# EAGLE board DAU_Kupplung_3phasig_ATmega (EAGLE 6.1)
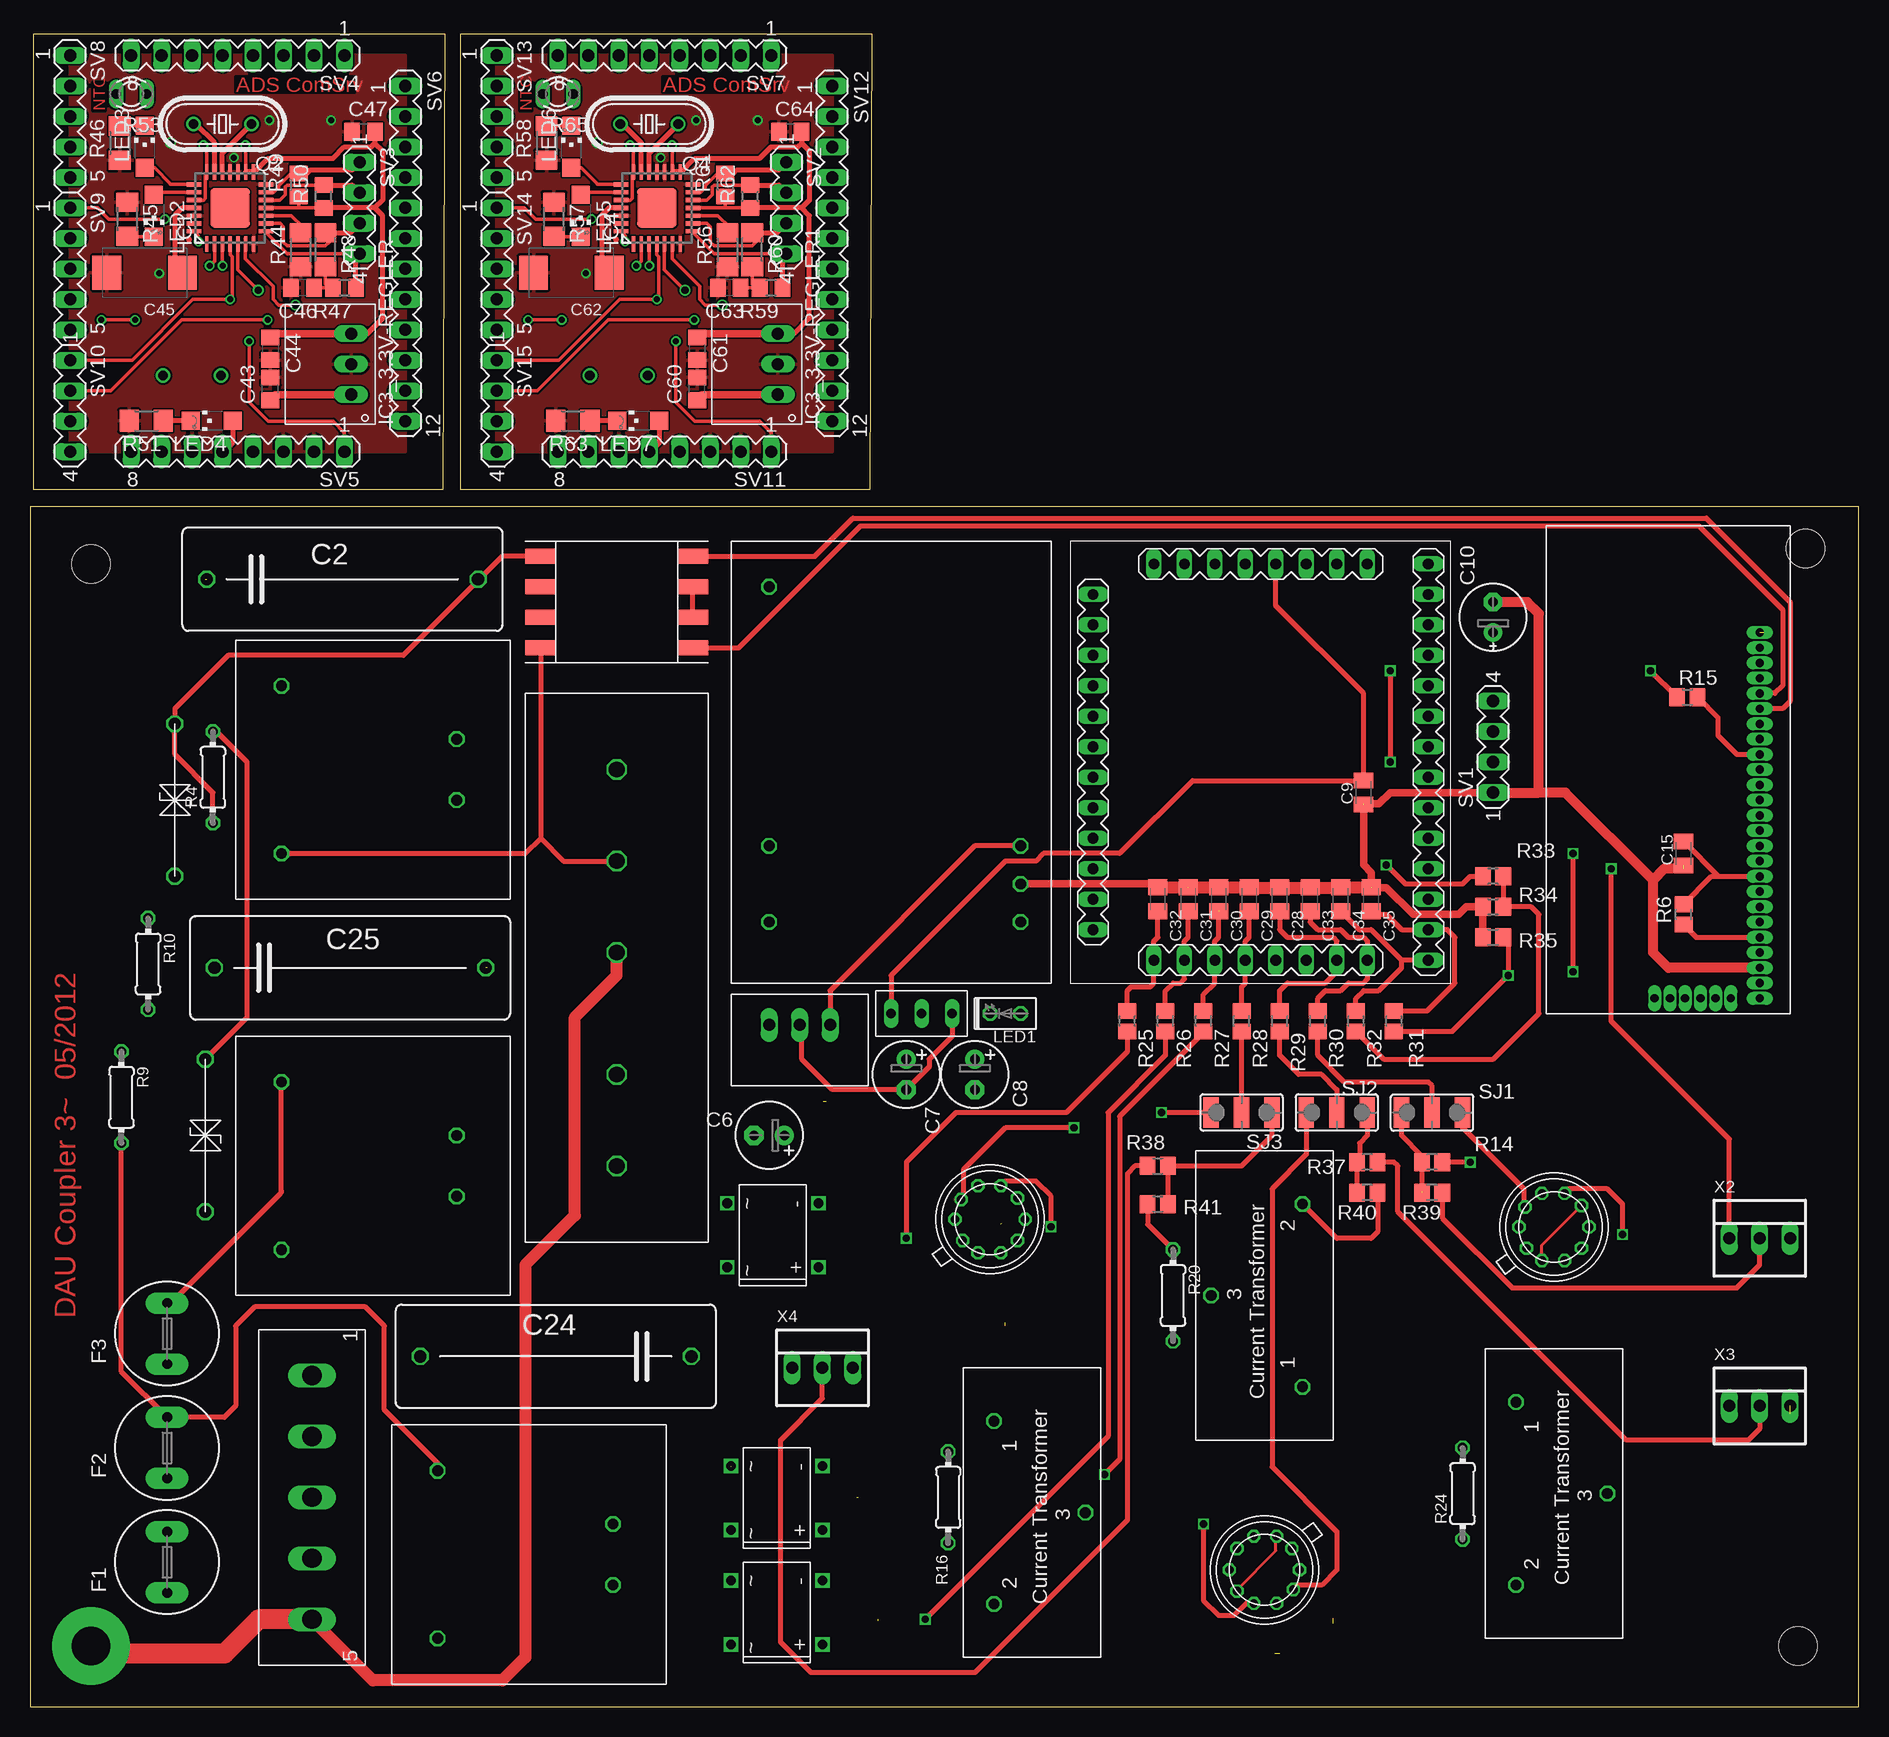
[diagram p0: board, top side]
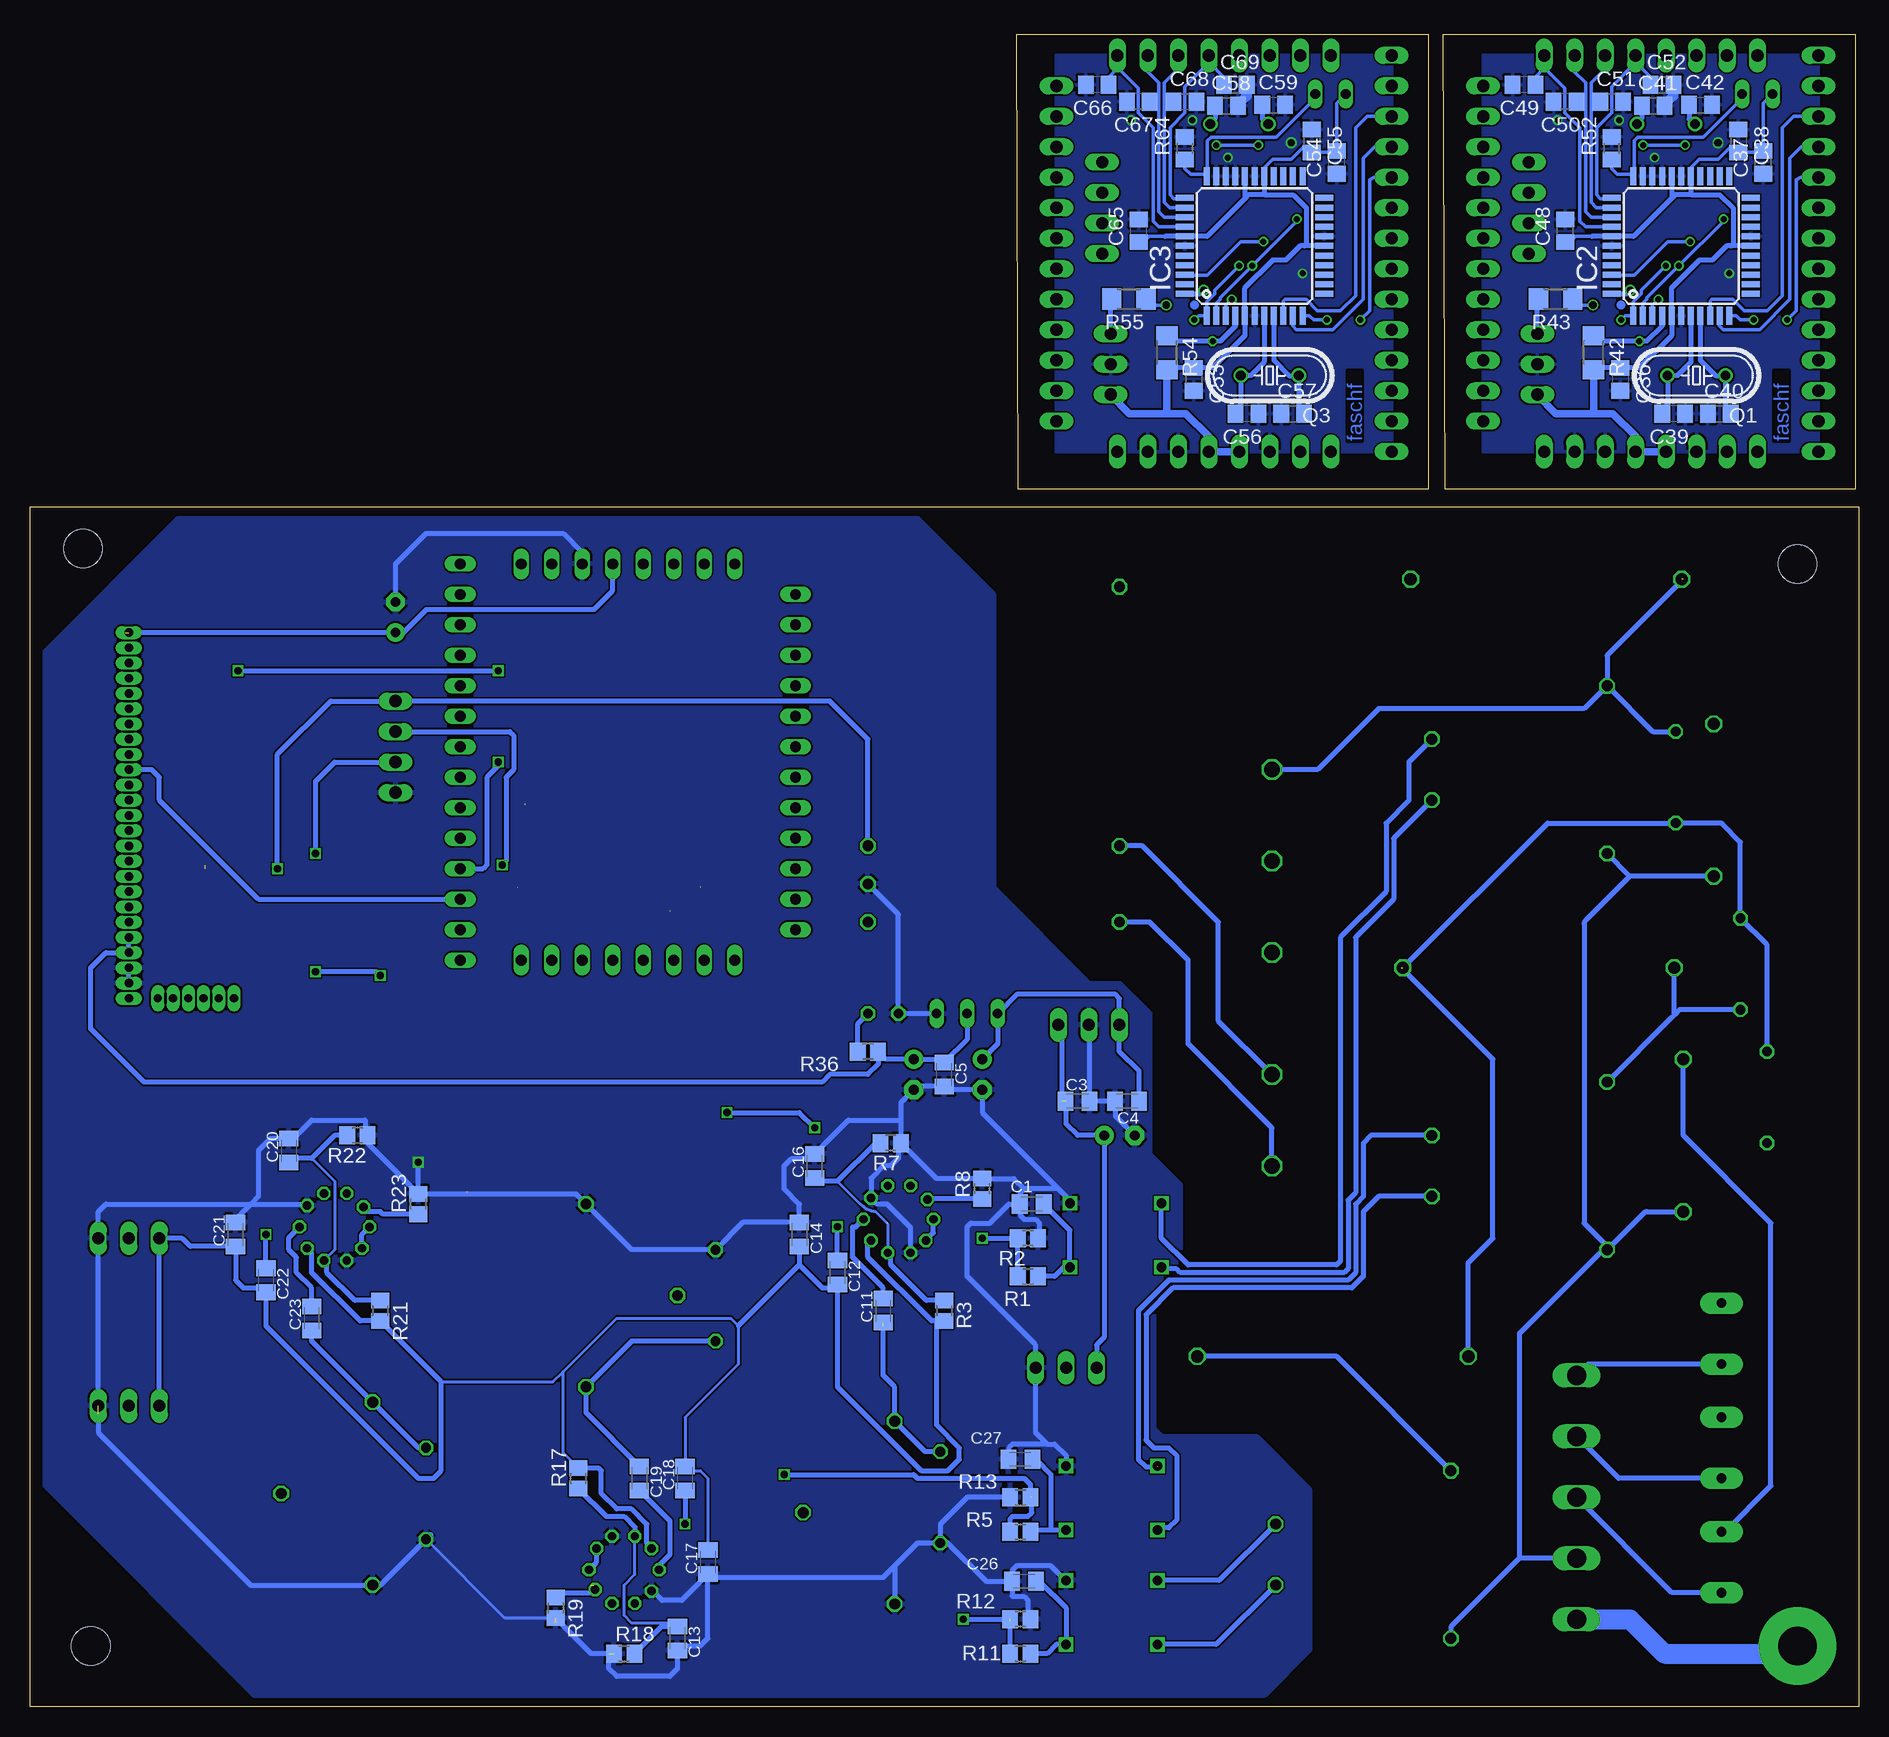
[diagram p1: board, bottom side, seen from below]

Size 152.38 x 139.38 mm. Coordinates in mm from the lower left corner, seen from the top.
Outline: 0,0 152.38,0 152.38,100 0,100 0,0
Outline: 34.61,139.38 0.28,139.38 0.28,101.46 34.45,101.46 34.61,139.38
Outline: 70.17,139.38 35.84,139.38 35.84,101.46 70.01,101.46 70.17,139.38
Copper layers (1*16): Top 0.035mm / dielectric 1.5mm / Bottom 0.035mm
Design rules: minimum track width 0.15mm, minimum drill 0.3mm, track to track 0.15mm, track to pad 0.15mm, pad to pad 0.15mm, via to via 0.15mm, smd to smd 0.15mm, copper to edge 0.3mm, drill to drill 0.2mm, minimum pad ring 0.2mm, minimum via ring 0.15mm, stop-mask expansion 0.075mm, vias tented up to drill 0mil, thermal gap 0.2mm
Holes 3.2 mm at 147.96,96.52 147.32,5.08 5.08,95.25

## Footprints (pad centres in the part's own frame; a part is rotated, then mirrored left to right if it is on the bottom)
AC1010 = drill 0.9 octagon: P$1 20.32,8.89; P$2 5.08,8.89; P$3 12.7,1.27
C0805K = smd 1.3 x 1.6: 1 -1,0; 2 1,0
C225-087X268 = drill 1.016 octagon: 1 -11.303,0; 2 11.303,0
E2,5-6 = drill 0.813 pad 1.6: + -1.27,0 | drill 0.813 pad 1.6 octagon: - 1.27,0
E2,5-6E = drill 0.813 pad 1.575: + -1.27,0 | drill 0.813 pad 1.575 octagon: - 1.27,0
C0805 = smd 1.3 x 1.5: 1 -0.95,0; 2 0.95,0
SMC_D = smd 2.4 x 2.8: + -3.15,0; - 3.15,0
TR5 = drill 0.813 pad 1.778 long: 1 -2.54,0; 2 2.54,0
QFN28_LONG_ERRLES = smd 1.27 x 0.35: 1 -3,1.95; 2 -3,1.3; 3 -3,0.65; 4 -3,0; 5 -3,-0.65; 6 -3,-1.3; 7 -3,-1.95; 15 3,-1.95; 16 3,-1.3; 17 3,-0.65; 18 3,0; 19 3,0.65; 20 3,1.3; 21 3,1.95 | smd 0.35 x 1.27: 8 -1.95,-3; 9 -1.3,-3; 10 -0.65,-3; 11 0,-3; 12 0.65,-3; 13 1.3,-3; 14 1.95,-3; 22 1.95,3; 23 1.3,3; 24 0.65,3; 25 0,3; 26 -0.65,3; 27 -1.3,3; 28 -1.95,3 | smd 3.302 x 3.302: EXP 0,0
TQFP44 = smd 1.5 x 0.5: 1 -5.8,4; 2 -5.8,3.2; 3 -5.8,2.4; 4 -5.8,1.6; 5 -5.8,0.8; 6 -5.8,0; 7 -5.8,-0.8; 8 -5.8,-1.6; 9 -5.8,-2.4; 10 -5.8,-3.2; 11 -5.8,-4; 23 5.8,-4; 24 5.8,-3.2; 25 5.8,-2.4; 26 5.8,-1.6; 27 5.8,-0.8; 28 5.8,0; 29 5.8,0.8; 30 5.8,1.6; 31 5.8,2.4; 32 5.8,3.2; 33 5.8,4 | smd 0.5 x 1.5: 12 -4,-5.8; 13 -3.2,-5.8; 14 -2.4,-5.8; 15 -1.6,-5.8; 16 -0.8,-5.8; 17 0,-5.8; 18 0.8,-5.8; 19 1.6,-5.8; 20 2.4,-5.8; 21 3.2,-5.8; 22 4,-5.8; 34 4,5.8; 35 3.2,5.8; 36 2.4,5.8; 37 1.6,5.8; 38 0.8,5.8; 39 0,5.8; 40 -0.8,5.8; 41 -1.6,5.8; 42 -2.4,5.8; 43 -3.2,5.8; 44 -4,5.8
RECOM_3POL = drill 1.016 long: 1 -2.54,0; 2 0,0; 3 2.54,0
LED2X5 = drill 0.813 octagon: A -1.27,0; K 1.27,0
CHIPLED_1206 = smd 1.5 x 1.5: A 0,-1.75; C 0,1.75
TSV = drill 1 octagon: P$1 -5.08,0; P$2 7.62,0
HC49/S = drill 0.813: 1 -2.413,0; 2 2.413,0
R0805 = smd 1.3 x 1.5: 1 -0.85,0; 2 0.85,0
0204/7 = drill 0.813 octagon: 1 -3.81,0; 2 3.81,0
R1206 = smd 1.6 x 1.803: 1 -1.422,0; 2 1.422,0
R0805' = smd 1.3 x 1.5: 1 -0.95,0; 2 0.95,0
P640 = drill 0.813 long: 1 -1.27,0; 2 1.27,0
SJ_2W = smd 1.27 x 2.54: 1 -2.54,0; 2 0,0; 3 2.54,0
MA04-1 = drill 1.016 long: 1 -3.81,0; 2 -1.27,0; 3 1.27,0; 4 3.81,0
MA08-1 = drill 1.016 long: 1 -8.89,0; 2 -6.35,0; 3 -3.81,0; 4 -1.27,0; 5 1.27,0; 6 3.81,0; 7 6.35,0; 8 8.89,0
MA12-1 = drill 1.016 long: 1 -13.97,0; 2 -11.43,0; 3 -8.89,0; 4 -6.35,0; 5 -3.81,0; 6 -1.27,0; 7 1.27,0; 8 3.81,0; 9 6.35,0; 10 8.89,0; 11 11.43,0; 12 13.97,0
MA05-1 = drill 1.016 long: 1 -5.08,0; 2 -2.54,0; 3 0,0; 4 2.54,0; 5 5.08,0
RAC04_12SA = drill 0.9 octagon: +VO 25.4,24.13; GND 28.575,24.13; L 31.75,3.175; N 25.4,3.175; NC 3.81,3.175; NC1 31.75,24.13
TRAFO_0,35VA = drill 0.9 octagon: L 3.81,17.78; N 3.81,3.81; OUT1 18.415,13.335; OUT2 18.415,8.255
ADUC_MINIMUM = drill 0.9 long: ADC0 -9.207,-16.51; ADC1 -6.668,-16.51; ADC2 -4.128,-16.51; ADC3 -1.587,-16.51; ADC4 6.032,-16.51; ADC5 8.572,-16.51; ADC6 13.652,-16.51; ADC7 13.652,-13.97; ALE -14.287,6.35; DAC0 0.953,-16.51; DAC1 3.493,-16.51; GND 3.493,16.51; GND2 -4.128,16.51; GND3 -6.668,16.51; INT0 13.652,-6.35; MISO 13.652,-3.81; MOSI 13.652,11.43; P00 -14.287,3.81; P01 -14.287,1.27; P02 -14.287,-1.27; P03 -14.287,-3.81; P04 -14.287,-6.35; P05 -14.287,-8.89; P06 -14.287,-11.43; P07 -14.287,-13.97; P20 13.652,13.97; P21 13.652,16.51; P22 8.572,16.51; P23 6.032,16.51; P24 -9.207,16.51; P25 -14.287,13.97; P34 13.652,-1.27; P35 13.652,1.27; P36 13.652,3.81; P37 13.652,6.35; PWM0 -14.287,11.43; PWM1 -14.287,8.89; RXD 13.652,-11.43; SCLOCK 13.652,8.89; TXD 13.652,-8.89; VCC 0.953,16.51; VCC1 -1.587,16.51
MODEM_FUSS = drill 0.7 pad 0.813 long: P$1 -20.32,-8.89; P$2 -19.05,-8.89; P$3 -17.78,-8.89; P$4 -16.51,-8.89; P$5 -15.24,-8.89; P$6 -13.97,-8.89; P$7 -12.7,-8.89; P$8 -11.43,-8.89; P$9 -10.16,-8.89; P$10 -8.89,-8.89; P$11 -7.62,-8.89; P$12 -6.35,-8.89; P$13 -5.08,-8.89; P$14 -3.81,-8.89; P$15 -2.54,-8.89; P$16 -1.27,-8.89; P$17 0,-8.89; P$18 1.27,-8.89; P$19 2.54,-8.89; P$20 3.81,-8.89; P$21 5.08,-8.89; P$22 6.35,-8.89; P$23 7.62,-8.89; P$24 8.89,-8.89; P$25 10.16,-8.89; P$29 -20.32,-3.937; P$30 -20.32,-5.207; P$31 -20.32,-6.477 | drill 0.7 pad 0.61 long: P$26 -20.32,-0.127; P$27 -20.32,-1.397; P$28 -20.32,-2.667
PLC-UEBERTRAGER_V2 = smd 2.54 x 1.27: 1LINE1 6.35,3.81; 2 6.35,1.27; 3 6.35,-1.27; 4LINE2 6.35,-3.81; 6NC -6.35,1.27; 7NC -6.35,-1.27; 8N -6.35,-3.81; L5 -6.35,3.81
RECTIFIER = drill 0.8 square: + 6.858,7.62; - 1.524,7.62; ~1 1.524,0; ~2 6.858,0
RECOM785X = drill 1 long: GND 0,2.54; VIN -2.54,2.54; VOUT 2.54,2.54
TS1084_HOCH = drill 0.8 long: GND 0,0; IN 5.08,0; OUT 2.54,0
TO100_10PIN = drill 0.7 octagon: 1 2.794,-1.016; 2 2.794,0.889; 3 1.778,2.286; 4 0,2.921; 5 -1.778,2.286; 6 -2.794,0.889; 7 -2.794,-1.016; 8 -1.651,-2.413; 9 0,-2.921; 10 1.778,-2.286
NETZFILTER = drill 1.3 octagon: L 6.35,7.62; L' 39.37,7.62; N 13.97,7.62; N' 31.75,7.62; PE 21.59,7.62
CONNECTOR_5_POL = drill 1.6 long: P$1 3.81,4.445; P$2 8.89,4.445; P$3 13.97,4.445; P$4 19.05,4.445; P$5 24.13,4.445
22-23-2031 = drill 1 long: 1 -2.54,0; 2 0,0; 3 2.54,0

## Placement (x,y rotation side)
AC1002_1  AC1010  [AC1010]  89.22,3.49 90 top
C1  1µ  [C0805K]  68.9,41.91 180 bottom
C2  470n/270V  [C225-087X268]  26.04,93.98 0 top
C3  100n  [C0805K]  65.09,50.48 0 bottom
C4  100n  [C0805K]  60.96,50.48 180 bottom
C5  100n  [C0805K]  76.2,52.7 270 bottom
C6  4,7µ  [E2,5-6]  61.59,47.62 180 top
C7  4,7µ  [E2,5-6]  73.03,52.7 270 top
C8  4,7µ  [E2,5-6]  78.74,52.7 270 top
C9  100n  [C0805K]  111.12,76.2 90 top
C10  4µ7  [E2,5-6E]  121.92,90.81 90 top
C11  1µ  [C0805K]  81.28,33.02 90 bottom
C12  4µ7  [C0805K]  85.09,36.2 270 bottom
C13  1µ  [C0805K]  98.42,5.71 270 bottom
C14  1µ  [C0805K]  88.27,39.37 270 bottom
C15  1µ  [C0805K]  137.79,71.12 90 top
C16  1µ  [C0805K]  87,45.09 90 bottom
C17  1µ  [C0805K]  95.89,12.06 90 bottom
C18  4µ7  [C0805K]  97.79,19.05 90 bottom
C19  1µ  [C0805K]  101.6,19.05 270 bottom
C20  1µ  [C0805K]  130.81,46.35 90 bottom
C21  1µ  [C0805K]  135.25,39.37 90 bottom
C22  4µ7  [C0805K]  132.72,35.56 270 bottom
C23  1µ  [C0805K]  128.91,32.38 90 bottom
C24  470n/270V  [C225-087X268]  43.81,29.21 180 top
C25  470n/270V  [C225-087X268]  26.67,61.59 0 top
C26  1µ  [C0805K]  69.53,10.48 180 bottom
C27  1µ  [C0805K]  69.85,20.64 180 bottom
C28  100n  [C0805K]  104.14,67.31 90 top
C29  100n  [C0805K]  101.6,67.31 90 top
C30  100n  [C0805K]  99.06,67.31 90 top
C31  100n  [C0805K]  96.52,67.31 90 top
C32  100n  [C0805K]  93.98,67.31 90 top
C33  100n  [C0805K]  106.68,67.31 90 top
C34  100n  [C0805K]  109.22,67.31 90 top
C35  100n  [C0805K]  111.76,67.31 90 top
C36  100n  [C0805]  19.85,110.63 270 bottom
C37  100n  [C0805]  7.93,128.72 90 bottom
C38  100n  [C0805]  10.01,130.49 270 bottom
C39  22p  [C0805]  15.41,107.78 180 bottom
C40  22p  [C0805]  11.6,107.78 0 bottom
C41  22p  [C0805]  17.11,133.44 0 bottom
C42  22p  [C0805]  13.18,133.5 0 bottom
C43  100n  [C0805]  20.03,109.84 90 top
C44  100n  [C0805]  20.03,113.18 270 top
C45  10u  [SMC_D]  9.55,119.52 180 top
C46  10n  [C0805]  22.71,118.25 180 top
C47  10n  [C0805]  27.79,131.27 0 top
C48  100n  [C0805]  24.43,123.02 90 bottom
C49  10n  [C0805]  27.89,135.18 180 bottom
C50  10n  [C0805]  24.46,133.78 180 bottom
C51  10n  [C0805]  20.57,133.78 0 bottom
C52  10n  [C0805]  16.37,135.18 0 bottom
C53  100n  [C0805]  55.41,110.63 270 bottom
C54  100n  [C0805]  43.49,128.72 90 bottom
C55  100n  [C0805]  45.57,130.49 270 bottom
C56  22p  [C0805]  50.97,107.78 180 bottom
C57  22p  [C0805]  47.16,107.78 0 bottom
C58  22p  [C0805]  52.67,133.44 0 bottom
C59  22p  [C0805]  48.74,133.5 0 bottom
C60  100n  [C0805]  55.59,109.84 90 top
C61  100n  [C0805]  55.59,113.18 270 top
C62  10u  [SMC_D]  45.11,119.52 180 top
C63  10n  [C0805]  58.27,118.25 180 top
C64  10n  [C0805]  63.35,131.27 0 top
C65  100n  [C0805]  59.99,123.02 90 bottom
C66  10n  [C0805]  63.45,135.18 180 bottom
C67  10n  [C0805]  60.02,133.78 180 bottom
C68  10n  [C0805]  56.13,133.78 0 bottom
C69  10n  [C0805]  51.93,135.18 0 bottom
F1  T250mA/240V  [TR5]  11.43,12.06 90 top
F2  T250mA/240V  [TR5]  11.43,21.59 90 top
F3  T250mA/240V  [TR5]  11.43,31.11 90 top
IC1  ENC28J60QFN28_LONG_28  [QFN28_LONG_ERRLES]  16.68,124.92 90 top
IC2  MEGA32-A  [TQFP44]  14.77,121.75 90 bottom
IC3  MEGA32-A  [TQFP44]  50.33,121.75 90 bottom
IC3_3.3V-REGLER  78RECOM  [RECOM_3POL]  26.76,111.9 90 top
IC3_3.3V-REGLER1  78RECOM  [RECOM_3POL]  62.32,111.9 90 top
IC4  ENC28J60QFN28_LONG_28  [QFN28_LONG_ERRLES]  52.24,124.92 90 top
LED1  [LED2X5]  81.28,57.78 180 top
LED2  [CHIPLED_1206]  10.33,124.29 180 top
LED3  [CHIPLED_1206]  9.55,130 0 top
LED4  [CHIPLED_1206]  15.13,107.18 90 top
LED5  [CHIPLED_1206]  45.89,124.29 180 top
LED6  [CHIPLED_1206]  45.11,130 0 top
LED7  [CHIPLED_1206]  50.69,107.18 90 top
P6KE300CA  P6KE300CA  [TSV]  14.61,48.9 270 top
Q1  16MHz  [HC49/S]  13.5,110.95 180 bottom
Q2  25MHz  [HC49/S]  16.04,131.91 180 top
Q3  16MHz  [HC49/S]  49.06,110.95 180 bottom
Q4  25MHz  [HC49/S]  51.6,131.91 180 top
R1  82k  [R0805]  69.22,35.88 0 bottom
R2  33k  [R0805]  69.22,39.05 180 bottom
R3  22k  [R0805]  76.2,33.02 270 bottom
R4  470k  [0204/7]  15.24,77.47 90 top
R5  82k  [R0805]  69.85,14.61 0 bottom
R6  1M  [R0805]  137.79,66.04 90 top
R7  10k  [R0805]  80.64,46.99 180 bottom
R8  4k7  [R0805]  73.03,43.18 90 bottom
R9  470k  [0204/7]  7.62,50.8 270 top
R10  470k  [0204/7]  9.84,61.91 270 top
R11  82k  [R0805]  69.85,4.45 0 bottom
R12  33k  [R0805]  69.85,7.3 180 bottom
R13  33k  [R0805]  69.85,17.46 0 bottom
R14  220R/33k  [R0805]  116.84,45.4 180 top
R15  330R  [R0805]  138.11,84.14 0 top
R16  68R  [0204/7]  76.52,17.46 90 top
R17  22k  [R0805]  106.68,19.05 90 bottom
R18  10k  [R0805]  102.87,4.45 0 bottom
R19  4k7  [R0805]  108.58,8.26 270 bottom
R20  68R  [0204/7]  95.25,34.29 270 top
R21  22k  [R0805]  123.19,33.02 270 bottom
R22  10k  [R0805]  125.09,47.62 180 bottom
R23  4k7  [R0805]  120.02,41.91 90 bottom
R24  68R  [0204/7]  119.38,17.78 90 top
R25  10R  [R0805]  91.44,57.15 90 top
R26  10R  [R0805]  94.61,57.15 90 top
R27  10R  [R0805]  97.79,57.15 90 top
R28  10R  [R0805]  100.97,57.15 90 top
R29  10R  [R0805]  104.14,57.15 90 top
R30  10R  [R0805]  107.31,57.15 90 top
R31  10R  [R0805]  113.67,57.15 90 top
R32  10R  [R0805]  110.49,57.15 90 top
R33  680k  [R0805]  121.92,69.22 180 top
R34  470k  [R0805]  121.92,66.67 0 top
R35  220R  [R0805]  121.92,64.14 0 top
R36  330R  [R0805]  82.55,54.61 180 bottom
R37  0/82k  [R0805]  111.44,45.4 180 top
R38  0/82k  [R0805]  93.98,45.09 0 top
R39  0/82k  [R0805]  116.84,42.86 180 top
R40  220R/33k  [R0805]  111.44,42.86 180 top
R41  220R/33k  [R0805]  93.98,41.91 0 top
R42  10k  [R1206]  22.08,112.86 270 bottom
R43  10k  [R1206]  25.24,117.33 180 bottom
R44  2k2  [R1206]  22.56,121.43 90 top
R45  220R  [R1206]  8.11,123.97 270 top
R46  220R  [R1206]  7.48,130.32 90 top
R47  51R  [R0805']  26.2,118.25 180 top
R48  51R  [R1206]  24.62,121.43 270 top
R49  51R  [R0805']  22.39,126.83 90 top
R50  51R  [R0805']  24.47,125.87 90 top
R51  220R  [R1206]  9.68,107.18 180 top
R52  10k  [R0805']  20.57,129.89 90 bottom
R53  [P640]  8.44,134.4 180 top
R54  10k  [R1206]  57.64,112.86 270 bottom
R55  10k  [R1206]  60.8,117.33 180 bottom
R56  2k2  [R1206]  58.12,121.43 90 top
R57  220R  [R1206]  43.67,123.97 270 top
R58  220R  [R1206]  43.04,130.32 90 top
R59  51R  [R0805']  61.76,118.25 180 top
R60  51R  [R1206]  60.18,121.43 270 top
R61  51R  [R0805']  57.95,126.83 90 top
R62  51R  [R0805']  60.03,125.87 90 top
R63  220R  [R1206]  45.24,107.18 180 top
R64  10k  [R0805']  56.13,129.89 90 bottom
R65  [P640]  44,134.4 180 top
SJ1  [SJ_2W]  116.84,49.53 0 top
SJ2  [SJ_2W]  108.9,49.53 180 top
SJ3  [SJ_2W]  100.97,49.53 180 top
SV1  [MA04-1]  121.92,80.01 90 top
SV2  [MA04-1]  63.03,124.92 270 top
SV3  [MA04-1]  27.47,124.92 270 top
SV4  [MA08-1]  17.31,137.62 180 top
SV5  [MA08-1]  17.31,104.6 180 top
SV6  [MA12-1]  31.28,121.11 270 top
SV7  [MA08-1]  52.87,137.62 180 top
SV8  [MA05-1]  3.34,132.54 270 top
SV9  [MA05-1]  3.34,119.84 270 top
SV10  [MA04-1]  3.34,108.41 270 top
SV11  [MA08-1]  52.87,104.6 180 top
SV12  [MA12-1]  66.84,121.11 270 top
SV13  [MA05-1]  38.9,132.54 270 top
SV14  [MA05-1]  38.9,119.84 270 top
SV15  [MA04-1]  38.9,108.41 270 top
TSV2  TSV  [TSV]  12.06,76.83 270 top
U$1  RECOM_RAC04_12SA  [RAC04_12SA]  58.42,97.16 270 top
U$2  SICHERHEITSTRAFO  [TRAFO_0,35VA]  17.14,67.31 0 top
U$3  ADUC831_MINIMUM  [ADUC_MINIMUM]  102.87,78.74 0 top
U$4  MODEMSTECKER  [MODEM_FUSS]  135.25,79.38 90 top
U$5  PLC_UEBERTRAGER_V2  [PLC-UEBERTRAGER_V2]  48.9,92.08 0 top
U$7  AC1010  [AC1010]  97.16,46.99 270 top
U$8  RECTIFIER  [RECTIFIER]  58.1,43.5 270 top
U$10  RECOM_785_05  [RECOM785X]  64.14,59.37 180 top
U$11  TS1084_HOCH  [TS1084_HOCH]  76.83,57.78 180 top
U$12  AD536  [TO100_10PIN]  102.87,11.43 90 top
U$13  AD536  [TO100_10PIN]  80.01,40.64 270 top
U$14  AC1010  [AC1010]  132.72,5.08 90 top
U$15  AD536  [TO100_10PIN]  127,40.01 270 top
U$16  SICHERHEITSTRAFO  [TRAFO_0,35VA]  30.16,1.91 0 top
U$17  RECTIFIER  [RECTIFIER]  58.42,12.06 270 top
U$18  SICHERHEITSTRAFO  [TRAFO_0,35VA]  17.14,34.29 0 top
U$19  RECTIFIER  [RECTIFIER]  58.42,21.59 270 top
U$20  NETZFILTER_05_A  [NETZFILTER]  41.27,84.45 270 top
X1  CONNECTO_5_POL  [CONNECTOR_5_POL]  19.05,31.43 270 top
X2  22-23-2031  [22-23-2031]  144.15,39.05 0 top
X3  22-23-2031  [22-23-2031]  144.15,25.08 0 top
X4  22-23-2031  [22-23-2031]  66.04,28.26 0 top

## Library data of the parts
AC1002_1 P6KE300CA TSV2 U$1 U$2 U$4 U$7 U$8 U$10-U$20 X1 = ADS
C1-C9 C11-C35 R1-R41 = resistor
C10 C36-C69 R42-R52 R54-R64 = rcl
F1-F3 = fuse; OC_FARNELL: unknown; OC_NEWARK: unknown
IC1 IC4 = microchip
IC2 IC3 = atmel
IC3_3.3V-REGLER IC3_3.3V-REGLER1 = linear
LED1-LED7 = led
Q1-Q4 = crystal
R53 R65 = ptc-ntc
SJ1-SJ3 = jumper
SV1 = con-lstb; OC_FARNELL: unknown; OC_NEWARK: unknown
SV2-SV15 = con-lstb
U$3 = ADS_ADUCBoards
U$5 = ADS1
X2-X4 = con-molex; MF: MOLEX; MPN: 22-23-2031; OC_FARNELL: 1462950; OC_NEWARK: 30C0862

## Nets
1_TD+: IC1.13 R49.2 SV3.1
1_TD+1: IC4.13 R61.2 SV2.1
2_TD-: IC1.12 R50.2 SV3.2
2_TD-1: IC4.12 R62.2 SV2.2
3_RD+: IC1.9 R48.1 SV3.3
3_RD+1: IC4.9 R60.1 SV2.3
6_RD-: IC1.8 R47.1 SV3.4
6_RD-1: IC4.8 R59.1 SV2.4
+3V3: C5.1 C8.+ R6.1 R36.1 U$4.P$4 U$4.P$5 U$11.OUT
+5V: C4.1 C7.+ C9.2 C10.+ U$3.VCC U$4.P$25 U$10.VOUT U$11.IN
+12V: C3.1 C6.+ C12.2 C14.2 C17.2 C18.2 C21.1 C22.2 R3.2 R17.2 R21.2 SV1.4 U$1.+VO U$10.VIN U$12.3 U$13.3 U$15.3 X2.1 X3.1 X4.1
ADC0: C32.1 R25.2 U$3.ADC0
ADC1: C31.1 R26.2 U$3.ADC1
ADC2: C30.1 R27.2 U$3.ADC2
ADC3: C29.1 R28.2 U$3.ADC3
ADC4: C28.1 R29.2 U$3.ADC4
ADC5: C33.1 R30.2 U$3.ADC5
ADC6: C49.1 IC2.37 SV4.1
ADC7: C50.1 IC2.36 SV4.2
ADC8: C51.1 IC2.35 SV4.3
ADC9: C52.1 IC2.34 SV4.4
ADC10: C66.1 IC3.37 SV7.1
ADC11: C67.1 IC3.36 SV7.2
ADC12: C68.1 IC3.35 SV7.3
ADC13: C69.1 IC3.34 SV7.4
GND: AC1002_1.P$2 C1.2 C3.2 C4.2 C5.2 C6.- C7.- C8.- C9.1 C10.- C13.2 C14.1 C15.1 C16.2 C17.1 C20.2 C21.2 C26.2 C27.2 C28.2 C29.2 C30.2 C31.2 C32.2 C33.2 C34.2 C35.2 LED1.K R2.1 R7.1 R8.2 R12.1 R13.1 R14.1 R16.1 R18.1 R19.2 R20.1 R22.1 R23.2 R24.1 R34.1 R35.1 R40.1 R41.1 SV1.1 U$1.GND U$3.GND U$4.P$2 U$4.P$3 U$7.P$2 U$8.- U$10.GND U$11.GND U$12.1 U$12.5 U$13.1 U$13.5 U$14.P$2 U$15.1 U$15.5 U$17.- U$19.- X2.3 X3.3 X4.3
GND1: C36.2 C37.1 C38.1 C39.1 C40.1 C41.2 C42.2 C43.2 C44.2 C45.- C46.2 C47.1 C48.2 C49.2 C50.2 C51.2 C52.2 IC1.7 IC1.14 IC1.17 IC1.18 IC1.26 IC2.6 IC2.18 IC2.28 IC2.30 IC2.31 IC2.32 IC2.39 IC3_3.3V-REGLER.2 R44.1 R45.1 R46.1 R51.2 R52.2 SV5.2 SV5.3 SV5.6
GND2: C53.2 C54.1 C55.1 C56.1 C57.1 C58.2 C59.2 C60.2 C61.2 C62.- C63.2 C64.1 C65.2 C66.2 C67.2 C68.2 C69.2 IC3.6 IC3.18 IC3.28 IC3.30 IC3.31 IC3.32 IC3.39 IC3_3.3V-REGLER1.2 IC4.7 IC4.14 IC4.17 IC4.18 IC4.26 R56.1 R57.1 R58.1 R63.2 R64.2 SV11.2 SV11.3 SV11.6
I1: R28.1 SJ3.2
I1INTERN: R8.1 SJ3.3 U$13.8
I2: R29.1 SJ2.2
I2INTERN: R19.1 SJ2.3 U$12.8
I3: R30.1 SJ1.2
I3INTERN: R23.1 SJ1.3 U$15.8
INT0: IC2.11 SV8.5
INT1: IC3.11 SV13.5
L1: C2.1 F1.2 P6KE300CA.P$1 R4.2 U$2.L U$20.L
L2: C24.1 F2.2 R9.2 U$16.L
L3: C25.1 F3.2 R10.2 U$18.L
MISO: IC1.2 IC2.2 SV9.1
MISO1: IC3.2 IC4.2 SV14.1
MOSI: IC1.3 IC2.1 SV10.2
MOSI1: IC3.1 IC4.3 SV15.2
N: P6KE300CA.P$2 TSV2.P$2 U$2.N U$5.8N U$16.N U$18.N U$20.N X1.P$4
N$1: R15.2 U$4.P$17
N$2: AC1002_1.P$1 C11.1 R16.2
N$3: C11.2 U$13.4
N$4: U$2.OUT1 U$8.~1
N$5: U$4.P$20 U$5.1LINE1
N$6: U$13.9 U$13.10
N$7: C1.1 R1.2 U$8.+
N$8: C35.1 R31.2 U$3.ADC7
N$9: U$2.OUT2 U$8.~2
N$10: C26.1 R11.2 U$17.+
N$11: U$16.OUT1 U$17.~1
N$12: U$16.OUT2 U$17.~2
N$13: U$4.P$21 U$5.4LINE2
N$14: R15.1 U$3.TXD
N$15: U$3.RXD U$4.P$16
N$16: U$1.L U$20.L'
N$17: C16.1 R3.1 R7.2 U$13.2
N$18: C40.2 IC2.8 Q1.1
N$19: LED1.A R36.2
N$20: C15.2 R6.2 U$4.P$9
N$21: C12.1 U$13.6
N$22: C19.1 R20.2 U$7.P$1
N$23: C19.2 U$12.4
N$24: U$12.9 U$12.10
N$25: C34.1 R32.2 U$3.ADC6
N$26: C2.2 C24.2 C25.2 R4.1 R9.1 R10.1 TSV2.P$1 U$5.L5
N$27: C13.1 R17.1 R18.2 U$12.2
N$28: C39.2 IC2.7 Q1.2
N$29: C18.1 U$12.6
N$30: C23.1 R24.2 U$14.P$1
N$31: C23.2 U$15.4
N$32: U$15.9 U$15.10
N$33: U$5.2 U$5.3
N$34: C27.1 R5.2 U$19.+
N$35: U$18.OUT1 U$19.~1
N$36: U$18.OUT2 U$19.~2
N$37: R33.2 SV1.3
N$38: C20.1 R21.1 R22.2 U$15.2
N$39: C41.1 IC1.19 Q2.1
N$40: C22.1 U$15.6
N$41: U$1.N U$20.N'
N$42: R37.2 R40.2 SJ2.1
N$43: R37.1 X3.2
N$45: R14.2 R39.2 SJ1.1
N$46: F1.1 X1.P$3
N$47: F2.1 X1.P$2
N$48: F3.1 X1.P$1
N$49: R32.1 R33.1 R34.2
N$50: R31.1 R35.2 SV1.2
N$53: R39.1 X2.2
N$54: R38.2 R41.2 SJ3.1
N$55: R38.1 X4.2
N$56: C42.1 IC1.20 Q2.2
N$57: C45.+ IC1.25
N$58: IC1.28 IC2.42
N$59: IC1.6 R43.1
N$60: IC1.10 R44.2
N$61: LED2.C R45.2
N$62: IC1.23 LED2.A
N$63: IC1.22 LED3.A
N$64: LED3.C R46.2
N$65: C46.1 R47.2 R48.2
N$66: LED4.C R51.1
N$67: IC2.33 R52.1 R53.1
N$68: C57.2 IC3.8 Q3.1
N$69: C56.2 IC3.7 Q3.2
N$70: C58.1 IC4.19 Q4.1
N$71: C59.1 IC4.20 Q4.2
N$72: C62.+ IC4.25
N$73: IC3.42 IC4.28
N$74: IC4.6 R55.1
N$75: IC4.10 R56.2
N$76: LED5.C R57.2
N$77: IC4.23 LED5.A
N$78: IC4.22 LED6.A
N$79: LED6.C R58.2
N$80: C63.1 R59.2 R60.2
N$81: LED7.C R63.1
N$82: IC3.33 R64.1 R65.1
PE: U$20.PE X1.P$5
RESET: IC2.4 R42.1 SV5.1
RESET1: IC3.4 R54.1 SV11.1
RXD: IC2.9 SV8.3
RXD1: IC3.9 SV13.3
SCK: IC1.4 IC2.3 SV10.1
SCK1: IC3.3 IC4.4 SV15.1
SS: IC1.5 IC2.44
SS1: IC3.44 IC4.5
TXD: IC2.10 SV8.4
TXD1: IC3.10 SV13.4
U1: R1.1 R2.2 R25.1
U2: R11.1 R12.2 R26.1
U3: R5.1 R13.2 R27.1
VCC_3V: C44.1 C47.2 IC1.11 IC1.15 IC1.16 IC1.21 IC1.24 IC3_3.3V-REGLER.3 R43.2 R49.1 R50.1
VCC_3V1: C61.1 C64.2 IC3_3.3V-REGLER1.3 IC4.11 IC4.15 IC4.16 IC4.21 IC4.24 R55.2 R61.1 R62.1
VCC_5V: C36.1 C37.2 C38.2 C43.1 C48.1 IC2.5 IC2.17 IC2.27 IC2.29 IC2.38 IC3_3.3V-REGLER.1 LED4.A R42.2 R53.2 SV5.4 SV5.5
VCC_5V1: C53.1 C54.2 C55.2 C60.1 C65.1 IC3.5 IC3.17 IC3.27 IC3.29 IC3.38 IC3_3.3V-REGLER1.1 LED7.A R54.2 R65.2 SV11.4 SV11.5

## Tracks (layer width: path | path; a pad name or v marks a point on that pad's centre or on a via)
1_TD+
  Top 0.305: IC1.13 20.32,126.22 20.73,126.62 20.73,126.78 21.73,127.78 R49.2 | R49.2 | R49.2 23.03,127.78
  Top 0.406: 23.03,127.78 23.35,128.09 26.84,128.09 SV3.1
1_TD+1
  Top 0.305: IC4.13 55.88,126.22 56.29,126.62 56.29,126.78 57.29,127.78 R61.2 | R61.2 | R61.2 58.59,127.78
  Top 0.406: 58.59,127.78 58.91,128.09 62.4,128.09 SV2.1
2_TD-
  Top 0.305: IC1.12 20.82,125.57 21.28,126.03 21.28,126.66 21.44,126.83 24.93,126.83 R50.2
  Top 0.406: R50.2 26.84,126.82 SV3.2
2_TD-1
  Top 0.305: IC4.12 56.38,125.57 56.84,126.03 56.84,126.66 57,126.83 60.49,126.83 R62.2
  Top 0.406: R62.2 62.4,126.82 SV2.2
3_RD+
  Top 0.305: IC1.9 20.84,123.62 21.12,123.33 21.12,122.06 21.44,121.75 24.62,121.75 24.93,122.06 R48.1
  Top 0.406: R48.1 26.67,122.85 SV3.3
3_RD+1
  Top 0.305: IC4.9 56.4,123.62 56.68,123.33 56.68,122.06 57,121.75 60.18,121.75 60.49,122.06 R60.1
  Top 0.406: R60.1 62.23,122.85 SV2.3
6_RD-
  Top 0.305: IC1.8 19.58,122.97 21.44,121.11 SV3.4
  Top 0.406: R47.1 27.15,120.79 SV3.4
6_RD-1
  Top 0.305: IC4.8 55.14,122.97 57,121.11 SV2.4
  Top 0.406: R59.1 62.71,120.79 SV2.4
+3V3
  Top 0.406: R6.1 138.85,64.14 U$4.P$5
  Bottom 0.406: U$11.OUT 74.3,55.61 C5.1 76.47,53.98 C8.+ 81.06,53.98 R36.1 81.7,53.55 82.55,52.7 85.72,52.7 86.36,52.07 142.88,52.07 147.32,56.52 147.32,61.59 146.05,62.87 U$4.P$4 U$4.P$5
+5V  (1 unrouted)
  Top 0.406: U$11.IN 71.75,60.96 81.28,70.48 83.82,70.48 84.45,71.12 90.81,71.12 96.89,77.2 C9.2 | C9.2 111.12,84.45 103.82,91.76 U$3.VCC | C9.2 111.12,77.15
  Bottom 0.406: C4.1 59.96,52.98 61.59,54.61 U$10.VOUT 61.59,59.05 61.91,59.37 70.17,59.37 U$11.IN 71.75,55.24 C7.+ | U$3.VCC 103.82,93.03 105.41,91.44 119.38,91.44 121.28,89.53 C10.+ 144.46,89.53
+12V  (via drill 0.6)  (1 unrouted)
  Top 0.406: U$1.+VO 78.74,71.75 66.67,59.69 U$10.VIN | X2.1 141.6,47.31 131.76,57.15 v131.76,69.85
  Bottom 0.254: R17.2 107.95,21.17 107.95,27.94 | 107.95,27.94 103.5,32.38 93.98,32.38 93.34,31.75 93.34,28.57 97.79,24.13 C18.2 | C18.2 97.79,19.68 | C18.2 97.42,19.68 96.52,19.68 95.89,19.05 C17.2 | 118.11,27.09 108.8,27.09 107.95,27.94
  Bottom 0.406: U$10.VIN 66.41,56.24 66.41,50.53 66.36,50.48 | U$1.+VO 82.55,80.64 85.72,83.82 SV1.4 127.32,83.82 131.76,79.38 v131.76,69.85 | C3.1 66.04,50.44 66.04,48.58 65.09,47.62 C6.+ 62.87,30.8 63.5,30.16 X4.1 | X3.1 X2.1 139.7,39.05 139.02,38.37 C21.1 135.25,35.56 134.62,34.92 133.08,34.92 C22.2 132.72,31.75 120.02,19.05 118.75,19.05 118.11,19.68 118.11,27.09 R21.2 124.88,32.17 128.91,36.2 128.91,37.85 U$15.3 | C14.2 88.27,36.83 | 88.27,36.83 86.36,34.92 85.36,34.92 C12.2 85.09,26.67 78.11,19.68 75.88,19.68 74.93,20.64 74.93,21.59 76.83,23.5 76.83,32.17 | R3.2 76.83,32.17 | 76.83,32.17 77.25,32.17 82.55,37.47 82.55,38.61 U$13.3 | C18.2 98.16,19.68 | C17.2 96.03,13.21 | U$12.3 100.97,13.59 100.97,15.24 102.23,16.51 103.5,16.51 104.78,17.78 104.78,19.68 104.99,19.9 R17.2 | 93.34,31.75 88.27,36.83
ADC0
  Top 0.406: R25.2 91.44,59.69 91.76,60.01 93.34,60.01 93.66,60.33 U$3.ADC0 93.66,63.82 93.98,64.14 C32.1
ADC1
  Top 0.406: R26.2 94.61,59.69 95.25,60.33 95.89,60.33 96.2,60.64 U$3.ADC1 96.2,63.82 96.52,64.14 C31.1
ADC2  (1 unrouted)
  Top 0.406: R27.2 97.79,59.37 98.74,60.33 U$3.ADC2 98.74,63.82 99.06,64.14 99.06,66.36
ADC3
  Top 0.406: R28.2 100.97,60.01 101.28,60.33 U$3.ADC3 101.28,63.82 101.6,64.14 C29.1
ADC4
  Top 0.406: C28.1 104.14,64.77 104.78,64.14 108.58,64.14 108.9,63.82 U$3.ADC4 108.9,61.28 107.95,60.33 104.78,60.33 104.14,59.69 R29.2
ADC5
  Top 0.406: C33.1 106.68,65.41 107.31,64.77 109.22,64.77 109.86,64.14 111.12,64.14 111.44,63.82 U$3.ADC5 111.44,60.64 111.12,60.33 109.86,60.33 109.22,59.69 107.95,59.69 107.31,59.05 R30.2
ADC6
  Bottom 0.305: IC2.37 22.74,123.34 23.22,123.83 23.22,131.6 24.46,132.85 24.46,134.87 26.18,136.58 | 26.18,136.58 26.18,137.59 SV4.1 | C49.1 26.94,135.82 26.18,136.58
ADC7
  Bottom 0.305: IC2.36 22.3,124.14 22.75,124.6 22.75,134.09 | 22.75,134.09 22.75,135.34 23.69,136.27 23.69,137.64 | 23.69,137.67 23.69,137.64 | 23.69,137.64 SV4.2 | C50.1 23.06,133.78 22.75,134.09
ADC8
  Bottom 0.305: IC2.35 21.85,124.94 22.29,125.38 22.29,134.09 | 22.29,134.09 22.29,135.34 21.2,136.43 21.2,137.55 SV4.3 | C51.1 21.97,133.78 22.29,134.09
ADC9
  Bottom 0.305: 18.55,137.05 18.55,137.59 SV4.4 | IC2.34 20.57,125.69 21.51,125.69 21.82,126 21.82,131.6 20.57,132.85 20.57,135.03 18.55,137.05 | C52.1 17.32,135.82 18.55,137.05
ADC10
  Bottom 0.305: IC3.37 58.3,123.34 58.78,123.83 58.78,131.6 60.02,132.85 60.02,134.87 61.73,136.58 | 61.73,136.58 61.73,137.59 SV7.1 | C66.1 62.5,135.82 61.73,136.58
ADC11
  Bottom 0.305: IC3.36 57.85,124.14 58.31,124.6 58.31,134.09 | 58.31,134.09 58.31,135.34 59.24,136.27 59.24,137.64 | 59.24,137.67 59.24,137.64 | 59.24,137.64 SV7.2 | C67.1 58.62,133.78 58.31,134.09
ADC12
  Bottom 0.305: IC3.35 57.41,124.94 57.84,125.38 57.84,134.09 | 57.84,134.09 57.84,135.34 56.76,136.43 56.76,137.55 SV7.3 | C68.1 57.53,133.78 57.84,134.09
ADC13
  Bottom 0.305: 54.11,137.05 54.11,137.59 SV7.4 | IC3.34 56.13,125.69 57.07,125.69 57.38,126 57.38,131.6 56.13,132.85 56.13,135.03 54.11,137.05 | C69.1 52.88,135.82 54.11,137.05
GND  (via drill 0.6)  (7 unrouted)
  Top 0.254: U$15.1 125.98,38.48 U$15.5 | U$12.5 100.58,9.78 103.82,13.02 103.82,14.16 U$12.1
  Top 0.406: U$10.GND 64.31,56.34 64.31,53.99 66.87,51.44 C7.- 74.93,53.34 74.93,53.98 76.83,55.88 U$11.GND | C32.2 93.71,68.58 | C15.1 137.43,70.48 | R41.1 93.13,40.22 R20.1 | v120.02,45.4 R14.1 | R40.1 112.29,39.59 111.76,39.05 108.9,39.05 U$7.P$2
  Top 0.61: 93.71,68.58 U$1.GND | R34.1 120.97,66.67 | 120.97,66.67 119.7,66.67 119.06,66.04 115.25,66.04 113.03,68.26 111.76,68.26 111.76,69.53 111.12,70.17 111.12,75.25 112.39,75.25 113.35,76.2 SV1.1 | R35.1 121.07,66.57 120.97,66.67
  Top 0.813: U$4.P$3 136.53,61.59 135.25,62.87 135.25,68.9 | 137.79,69.85 136.21,69.85 135.25,68.9 | 135.25,68.9 127.95,76.2 125.73,76.2 | 121.6,76.2 SV1.1 125.73,76.2 | 125.73,76.2 125.73,91.12 124.78,92.08 C10.-
  Top 1.016: C32.2 96.47,68.31 96.52,68.26 | C31.2 C30.2 C29.2 101.6,68.26 104.09,68.26 C28.2 104.14,68.26 106.63,68.26 C33.2 106.68,68.26 109.17,68.26 C34.2 C35.2
  Bottom 0.254: R19.2 112.81,7.41 R24.1 | C17.1 95.61,10.79 | 69.85,40.96 69.85,41.86 C1.2
  Bottom 0.406: C10.- 121.92,95.25 119.38,97.79 107.95,97.79 106.36,96.2 U$3.GND | U$4.P$2 U$4.P$3 | U$11.GND LED1.K 80.01,66.04 U$1.GND | C21.2 135.25,40.64 133.99,41.91 | 133.99,41.91 129.41,41.91 U$15.5 | 133.99,41.91 133.35,42.55 133.35,46.35 132.35,47.35 C20.2 130.44,47.35 128.91,48.9 124.46,48.9 124.46,47.84 R22.1 124.25,46.99 R23.2 | R23.2 106.89,42.76 U$7.P$2 102.23,38.1 R20.1 92.98,40.37 C14.1 88.27,41.91 89.53,43.18 89.53,45.09 88.9,45.72 87.36,45.72 C16.2 84.19,48.9 79.8,48.9 | R7.1 76.83,44.03 R8.2 70.38,44.03 69.53,43.18 | R7.1 79.8,48.9 | 79.8,48.9 79.8,50.38 C8.- 78.47,51.7 C5.2 75.93,51.44 C7.- 73.03,49.53 66.67,43.18 | 118.96,14.39 R24.1 123.19,10.16 U$14.P$2 133.99,10.16 146.69,22.86 146.69,24.45 | U$12.5 100.46,9.65 99.69,8.89 98.06,8.89 C17.1 95.89,5.71 96.52,5.08 98.06,5.08 C13.2 98.42,3.17 99.06,2.54 103.5,2.54 104.14,3.17 104.14,4.45 | R18.1 105.62,4.45 108.17,6.99 108.58,6.99 | R7.1 80.01,46.77 80.01,45.72 80.64,45.09 81.28,45.09 82.3,44.07 U$13.5 81.79,41.91 80.96,41.91 78.99,39.94 U$13.1 | R16.1 78.42,13.65 80.33,11.75 | 80.33,11.75 AC1002_1.P$2 | 70.85,17.61 R13.1 74.3,17.46 76.52,15.24 R16.1 | 67.63,21.91 70.48,21.91 70.8,21.59 70.8,20.68 C27.2 | U$17.- 66.1,10.54 67.31,11.75 70.17,11.75 70.48,11.43 70.48,10.53 C26.2 | C26.2 70.53,9.26 70.48,9.21 69.53,9.21 69.22,8.89 69.22,7.52 R12.1 | 67.63,21.91 68.58,22.86 X4.3 68.58,30.16 74.3,35.88 74.3,40.01 73.98,40.32 72.39,40.32 70.8,41.91 C1.2 | 95.61,10.79 81.28,10.79 80.33,11.75 | R16.1 75.88,13.65 72.71,10.48 C26.2 | U$8.- 65.72,42.23 66.67,43.18 | 66.67,43.18 69.53,43.18 | 69.53,43.18 69.85,42.86 69.85,40.96 69.53,40.64 68.58,40.64 68.26,40.32 68.26,39.16 R2.1
  Bottom 0.406: X3.3 X2.3 146.69,41.27 146.05,41.91 133.99,41.91 | R23.2 v120.02,45.4 | C6.- 61.91,49.21 61.91,50.44 C4.2 C3.2 64.09,56.78 U$10.GND | 67.63,21.91 66.99,21.91 66.04,20.95 U$19.-
  pour Bottom: 45.72,16.51 45.72,4.76 49.53,0.95 133.67,0.95 151.13,18.41 151.13,87.95 140.02,99.06 78.42,99.06 72.07,92.71 72.07,68.26 64.14,60.33 61.59,60.33 59.37,58.1 59.05,57.78 59.05,46.04 56.52,43.5 56.52,34.92 58.42,33.02 58.74,32.7 58.74,23.18 58.1,22.54 50.16,22.54 45.72,18.1
GND1  (via drill 0.5 pad 0.25, 0.6)
  Bottom 0.813: C52.2 15.42,134.26 16.22,133.47 16.18,133.47 C41.2
  other vias: 25.09,132.23 19.95,132.23 10.77,119.47 17,129.11 11.71,130.36
  pour Bottom: 3.34,137.62 3.34,104.6 31.28,104.6 31.28,137.62
  pour Top: 31.28,137.62 3.34,137.62 3.34,104.6 31.28,104.6
GND2  (via drill 0.5 pad 0.25, 0.6)
  Bottom 0.813: C69.2 50.98,134.26 51.78,133.47 51.74,133.47 C58.2
  other vias: 60.65,132.23 55.51,132.23 46.33,119.47 52.56,129.11 47.27,130.36
  pour Bottom: 38.9,137.62 38.9,104.6 66.84,104.6 66.84,137.62
  pour Top: 66.84,137.62 38.9,137.62 38.9,104.6 66.84,104.6
I1
  Top 0.406: SJ3.2 R28.1
I1INTERN  (via drill 0.6)
  Top 0.406: 77.22,42.29 U$13.8 77.79,42.48 77.79,44.77 81.28,48.26 v87,48.26 | SJ3.3 v94.3,49.53
  Bottom 0.406: R8.1 77.56,42.33 U$13.8 | v94.3,49.53 88.27,49.53 v87,48.26
I2
  Top 0.406: R29.1 104.14,54.29 105.73,52.7 107.63,52.7 108.9,51.44 SJ2.2
I2INTERN  (1 unrouted)
  Top 0.406: SJ2.3 106.36,46.04 103.5,43.18 103.5,20 108.9,14.61 108.9,11.43 107.63,10.16 105.66,10.16 U$12.8
  Bottom 0.406: R19.1 108.17,9.53 105.41,9.53 105.41,10.16
I3
  Top 0.406: SJ1.2 116.84,51.75 116.52,52.07 109.54,52.07 107.31,54.29 R30.1
I3INTERN
  Top 0.406: SJ1.3 119.38,48.26 124.46,43.18 124.46,41.78 U$15.8
  Bottom 0.406: R23.1 122.97,41.06 123.19,41.27 124.21,41.27 U$15.8
INT0  (via drill 0.5 pad 0.25)
  Top 0.305: v8.75,115.58 v5.95,115.58
  Bottom 0.305: SV8.5 4.8,127.46 5.17,127.25 5.17,116.36 v5.95,115.58 | IC2.11 10.21,115.94 9.84,115.58 v8.75,115.58
INT1  (via drill 0.5 pad 0.25)
  Top 0.305: v44.31,115.58 v41.51,115.58
  Bottom 0.305: SV13.5 40.36,127.46 40.73,127.25 40.73,116.36 v41.51,115.58 | IC3.11 45.77,115.94 45.4,115.58 v44.31,115.58
L1  (1 unrouted)
  Top 0.406: P6KE300CA.P$1 18,57.38 arc45 18.1,57.6 18.1,78.74 15.65,81.19 arc45 15.43,81.28 R4.2
  Bottom 0.406: 14.61,93.98 20.95,87.63 U$2.L | U$2.L 17.14,81.28 R4.2 | U$2.L 22.86,83.19 40.01,83.19 45.09,78.11 U$20.L | F1.2 11.11,14.61 7.3,18.41 7.3,40.32 14.61,47.62 P6KE300CA.P$1
L2
  Top 0.406: R9.2 7.62,27.94 F2.2 16.19,24.13 17.14,25.08 17.14,31.75 18.73,33.34 27.94,33.34 29.53,31.75 29.53,24.77 33.97,20.32 U$16.L
  Bottom 0.406: U$16.L 43.5,29.21 C24.1
L3
  Top 0.406: U$18.L 20.95,42.99 arc-45 20.86,42.77 11.75,33.66 F3.2
  Bottom 0.406: U$18.L 15.56,57.47 15.37,57.66 | 15.37,57.66 C25.1 | R10.2 14.92,58.1 15.37,57.66
MISO  (via drill 0.5 pad 0.25)
  Top 0.305: v14.97,120.1 15.38,120.46 IC1.2 15.38,120.5 v14.97,120.09 | SV9.1 5.63,124.92 6.57,123.98 v11.24,123.98
  Bottom 0.305: IC2.2 17.97,116.96 17.63,117.3 17.63,117.43 v14.97,120.09 v14.97,120.1 11.24,123.83 v11.24,123.98
MISO1  (via drill 0.5 pad 0.25)
  Top 0.305: v50.53,120.1 50.94,120.46 IC4.2 50.94,120.5 v50.53,120.09 | SV14.1 41.19,124.92 42.13,123.98 v46.8,123.98
  Bottom 0.305: IC3.2 53.53,116.96 53.19,117.3 53.19,117.43 v50.53,120.09 v50.53,120.1 46.8,123.83 v46.8,123.98
MOSI  (via drill 0.5 pad 0.25)
  Top 0.305: IC1.3 16.03,120.28 v16.06,120.1 | v19.8,115.58 12.64,115.58 6.73,109.67 3.36,109.67 SV10.2
  Bottom 0.305: v16.06,120.1 18.11,118.04 18.11,117.77 18.77,117.11 IC2.1 19.43,115.94 v19.8,115.58
MOSI1  (via drill 0.5 pad 0.25)
  Top 0.305: IC4.3 51.59,120.28 v51.62,120.1 | v55.36,115.58 48.2,115.58 42.29,109.67 38.92,109.67 SV15.2
  Bottom 0.305: v51.62,120.1 53.67,118.04 53.67,117.77 54.33,117.11 IC3.1 54.99,115.94 v55.36,115.58
N
  Top 0.406: U$5.8N 42.55,72.39 | 42.55,72.39 44.45,70.48 U$20.N | U$2.N 41.27,71.12 42.55,72.39 | 33.97,6.03 U$16.N
  Bottom 0.406: TSV2.P$2 19.05,69.22 | 19.05,69.22 U$2.N | U$18.N 17.87,41.18 arc45 17.65,41.27 P6KE300CA.P$2 | 19.05,69.22 22.77,65.5 arc-45 22.86,65.27 22.86,40.32 21.05,38.51 arc45 20.95,38.29 U$18.N | X1.P$4 28.26,12.38 | 28.26,12.38 33.97,6.67 U$16.N | U$18.N 21.27,38.1 28.26,31.11 28.26,12.38
N$1
  Top 0.406: R15.2 140.65,82.45 140.65,80.96 142.24,79.38 U$4.P$17
N$2  (1 unrouted)
  Bottom 0.406: R16.2 77.79,21.27 AC1002_1.P$1 80.33,26.67 81.28,27.62 81.28,31.75
N$3
  Bottom 0.406: C11.2 81.28,34.92 83.82,37.47 83.82,40.01 83.57,40.01 U$13.4
N$4
  Bottom 0.406: U$2.OUT1 37.47,78.74 37.47,75.56 39.37,73.66 39.37,67.94 43.18,64.14 43.18,37.15 43.5,36.83 55.88,36.83 58.1,39.05 U$8.~1
N$5
  Top 0.406: U$5.1LINE1 65.41,95.89 68.58,99.06 139.7,99.06 146.69,92.08 146.69,83.82 146.05,83.19 U$4.P$20
N$6
  Bottom 0.406: U$13.10 77.09,39.5 U$13.9
N$7
  Bottom 0.406: C1.1 65.72,39.73 U$8.+ 66.23,36.64 66.99,35.88 R1.2
N$8
  Top 0.406: C35.1 112.03,66.04 113.03,66.04 114.3,64.77 U$3.ADC7 118.11,64.77 118.75,64.14 118.75,60.33 116.42,58 R31.2
N$9
  Bottom 0.406: U$2.OUT2 38.73,72.39 38.73,67.31 41.91,64.14 41.91,42.86 42.55,42.23 42.55,36.51 42.86,36.2 56.52,36.2 56.83,36.51 58.1,36.51 U$8.~2
N$10
  Bottom 0.406: R11.2 67.63,4.45 66.86,5.21 U$17.+ 66.04,8.26 68.26,10.48 C26.1
N$11
  Bottom 0.406: U$16.OUT1 53.28,10.54 U$17.~1
N$12
  Bottom 0.406: U$16.OUT2 53.53,5.21 U$17.~2
N$13
  Top 0.406: U$5.4LINE2 59.05,88.27 69.22,98.42 139.06,98.42 146.05,91.44 146.05,85.09 145.41,84.45 U$4.P$21
N$14  (via drill 0.6)
  Top 0.406: R15.1 v135.04,86.36 | v113.35,86.36 v113.35,78.74
  Bottom 0.406: v113.35,78.74 113.35,78.42 114.3,77.47 114.3,70.17 114.62,69.85 U$3.TXD | v135.04,86.36 v113.35,86.36
N$15
  Bottom 0.406: U$4.P$16 142.24,78.11 141.6,77.47 141.6,75.56 133.35,67.31 U$3.RXD
N$16
  Bottom 0.406: U$20.L' 48.9,48.26 55.88,55.24 55.88,62.23 59.05,65.41 U$1.L
N$17  (1 unrouted)
  Bottom 0.254: 80.9,40.26 U$13.2 | 85.09,43.81 83.19,41.91 arc-37 81.92,41.27 80.96,40.32
  Bottom 0.406: R7.2 81.92,46.99 85.09,43.81 86.72,43.81 C16.1 | R3.1 77.69,33.87 80.64,36.83 80.64,37.59 U$13.2
N$18
  Bottom 0.406: C40.2 11.09,108.22 Q1.1 11.92,110.95 13.17,112.21 IC2.8
N$19
  Bottom 0.406: R36.2 83.4,56.94 LED1.A
N$20
  Top 0.406: C15.2 140.7,69.22 | 140.7,69.22 U$4.P$9 | R6.2 140.12,69.22 140.7,69.22
N$21  (via drill 0.6)
  Top 0.406: v85.09,40.01 85.09,42.55 83.82,43.81 81.28,43.81 U$13.6
  Bottom 0.406: C12.1 v85.09,40.01
N$22
  Bottom 0.406: R20.2 102.23,30.48 U$7.P$1 106.05,24.5 C19.1
N$23
  Bottom 0.406: C19.2 99.06,15.51 99.06,12.7 99.95,11.81 U$12.4
N$24
  Bottom 0.406: U$12.9 105.16,12.06 U$12.10
N$25
  Top 0.406: C34.1 110.76,64.77 111.76,64.77 114.14,62.39 114.3,62.23 | R32.2 110.49,59.05 111.12,59.69 112.39,59.69 114.3,61.59 114.3,62.23 | U$3.ADC6 114.3,62.23
N$26  (1 unrouted)
  Top 0.254: C2.2 37.47,93.98 39.37,95.89
  Top 0.406: U$5.L5 39.37,95.89 31.11,87.63 16.51,87.63 12.06,83.19 TSV2.P$1 12.06,79.38 15.24,76.2 R4.1
  Bottom 0.406: 37.47,61.59 C25.2 25.91,73.66 R4.1 11.56,73.66 arc45 11.34,73.57 9.84,72.07 R10.1 7.62,63.5 R9.1 | C24.2 32.51,37.02 30.48,39.05 30.48,53.98 38.1,61.59
N$27
  Bottom 0.254: C13.1 98.69,6.99 102.23,6.99 102.87,7.62 102.87,10.16 101.98,11.05 U$12.2
  Bottom 0.406: R18.2 99.75,6.71 C13.1 | R17.1 104.36,15.88 102.87,15.88 101.98,14.99 U$12.2
N$28
  Bottom 0.305: C39.2 16.66,107.78 16.68,107.8
  Bottom 0.406: 16.04,107.78 C39.2 16.68,107.78 15.92,108.54 Q1.2 15.09,110.95 13.97,112.07 IC2.7
N$29  (via drill 0.6)
  Top 0.406: v97.79,15.24 97.79,8.89 99.06,7.62 100.33,7.62 101.35,8.64 U$12.6
  Bottom 0.406: C18.1 v97.79,15.24
N$30
  Bottom 0.406: R24.2 120.02,21.59 U$14.P$1 128.91,30.48 C23.1
N$31
  Bottom 0.406: C23.2 128.91,34.92 130.18,36.2 130.18,37.47 130.81,38.1 130.81,39.12 U$15.4
N$32
  Bottom 0.406: U$15.10 124.71,39.37 U$15.9
N$33
  Top 0.406: U$5.3 U$5.2
N$34
  Bottom 0.406: U$19.+ 67.31,14.73 | 67.31,14.73 68.87,14.73 R5.2 | C27.1 68.58,20.64 67.31,19.37 67.31,14.73
N$35  (1 unrouted)
  Bottom 0.406: U$18.OUT1 40.64,47.62 41.27,46.99 41.27,42.55 41.91,41.91 41.91,36.2 42.55,35.56 57.47,35.56 60.01,33.02 60.01,20.64 59.37,20 58.42,20
N$36
  Bottom 0.406: U$18.OUT2 40.01,42.55 41.27,41.27 41.27,35.88 42.23,34.92 57.15,34.92 59.37,32.7 59.37,22.23 58.74,21.59 57.47,21.59 56.83,20.95 56.83,15.56 57.47,14.92 58.23,14.92 U$19.~2
N$37  (via drill 0.6)
  Top 0.406: v113.03,70.17 114.62,68.58 119.38,68.58 120.02,69.22 R33.2
  Bottom 0.406: SV1.3 112.39,81.28 112.08,80.96 112.08,78.11 112.71,77.47 112.71,70.48 v113.03,70.17
N$38
  Bottom 0.254: U$15.2 127,38.1 127,43.81 128.54,45.35 128.91,45.72
  Bottom 0.406: R21.1 125.31,33.87 127.64,36.2 127.64,36.96 U$15.2 | R22.2 127,47.62 128.91,45.72 130.44,45.72 C20.1
N$39
  Top 0.406: IC1.19 16.03,129.48 Q2.1
  Bottom 0.305: 18.45,131.91 Q2.1
  Bottom 0.406: C41.1 18.06,132.41 18.4,131.91 18.45,131.91
N$40  (via drill 0.6)
  Top 0.406: v132.72,39.37 132.72,41.91 131.44,43.18 128.27,43.18 U$15.6
  Bottom 0.406: C22.1 v132.72,39.37
N$41
  Bottom 0.406: U$20.N' 53.34,57.15 53.34,65.41 59.69,71.75 U$1.N
N$42
  Top 0.406: R40.2 R37.2 110.81,45.62 110.81,46.99 111.44,47.62 SJ2.1
N$43
  Top 0.406: X3.2 144.15,23.18 143.19,22.23 133.03,22.23 113.98,41.27 113.98,45.09 113.67,45.4 R37.1
N$45  (1 unrouted)
  Top 0.406: SJ1.1 114.3,47.62 115.99,45.94 R14.2 115.99,42.97 115.89,42.86
N$46
  Bottom 0.406: F1.1 15.56,9.53 X1.P$3
N$47
  Bottom 0.406: F2.1 20,19.05 X1.P$2
N$48
  Bottom 0.406: F3.1 22.54,28.57 X1.P$1
N$49
  Top 0.406: R32.1 112.81,53.98 121.92,53.98 125.73,57.78 125.73,66.04 125.09,66.67 R34.2 R33.1
N$50  (via drill 0.6)
  Top 0.406: R31.1 118.53,56.3 v123.19,60.96 123.19,63.72 R35.2 | v128.59,61.28 v128.59,71.12
  Bottom 0.406: v123.19,60.96 123.51,61.28 v128.59,61.28 | v128.59,71.12 128.59,77.15 127,78.74 SV1.2
N$52  (via drill 3.2 pad 6.45)
  other vias: 5.08,5.08
N$53
  Top 0.406: R39.1 117.69,40.74 123.51,34.92 142.24,34.92 144.15,36.83 X2.2
N$54
  Top 0.406: SJ3.1 103.5,47.62 100.97,45.09 R38.2 R41.2
N$55
  Top 0.406: R38.1 92.08,45.09 91.44,44.45 91.44,15.56 78.74,2.86 65.09,2.86 62.55,5.4 62.55,22.23 66.04,25.72 X4.2
N$56
  Top 0.406: IC1.20 15.38,130.35 13.82,131.91 Q2.2 13.5,131.91
  Bottom 0.305: 13.73,131.91 Q2.2
  Bottom 0.406: C42.1 14.13,132.32 13.73,131.91
N$57
  Top 0.305: 12.07,120.46 C45.+
  Top 0.406: IC1.25 12.7,124.92 12.07,124.29 12.07,120.46
N$58  (via drill 0.5 pad 0.25)
  Top 0.305: IC1.28 14.04,122.61 v14.04,122.11
  Bottom 0.305: v14.04,122.11 15.91,122.11 18.71,119.31 20.57,119.31 IC2.42
N$59  (via drill 0.6)
  Top 0.305: 17.95,122.38 17.95,122.25 | 17.95,122.25 IC1.6 | 17.95,122.25 17.95,120.69 20.26,118.38 20.26,117.29 20.73,116.82 v22.13,116.82
  Bottom 0.305: v22.13,116.82 23.22,116.82 23.82,117.43 | 23.84,117.29 23.84,117.45 23.82,117.43 | R43.1 23.82,117.43
N$60
  Top 0.305: 22.71,123.33 21.76,124.28 19.32,124.28 | 19.22,124.28 19.32,124.28 | 19.32,124.28 19.33,124.29 19.35,124.27 IC1.10
  Top 0.406: R44.2 22.71,123.33
N$61
  Top 0.305: LED2.C 8.27,122.53 8.11,122.7 R45.2
N$62
  Top 0.305: IC1.23 10.51,126.22 LED2.A
N$63
  Top 0.305: IC1.22 11.71,126.87 11.71,126.94 10.39,128.25 LED3.A
N$64
  Top 0.305: LED3.C 8.12,131.75 R46.2
N$65
  Top 0.305: R48.2 24.62,118.57 R47.2 C46.1
N$66
  Top 0.406: LED4.C R51.1
N$67
  Bottom 0.305: R52.1 20.57,128.18 20.11,127.71 18.86,127.71 18.71,127.56 | R53.1 9.71,134.07 12.95,130.83 18.4,130.83 18.71,130.51 18.71,127.56 | 18.71,127.56 IC2.33
N$68
  Bottom 0.406: C57.2 46.65,108.22 Q3.1 47.48,110.95 48.73,112.21 IC3.8
N$69
  Bottom 0.305: C56.2 52.22,107.78 52.24,107.8
  Bottom 0.406: 51.6,107.78 C56.2 52.24,107.78 51.48,108.54 Q3.2 50.65,110.95 49.53,112.07 IC3.7
N$70
  Top 0.406: IC4.19 51.59,129.48 Q4.1
  Bottom 0.305: 54.01,131.91 Q4.1
  Bottom 0.406: C58.1 53.62,132.41 53.96,131.91 54.01,131.91
N$71
  Top 0.406: IC4.20 50.94,130.35 49.38,131.91 Q4.2 49.06,131.91
  Bottom 0.305: 49.29,131.91 Q4.2
  Bottom 0.406: C59.1 49.69,132.32 49.29,131.91
N$72
  Top 0.305: 47.63,120.46 C62.+
  Top 0.406: IC4.25 48.26,124.92 47.63,124.29 47.63,120.46
N$73  (via drill 0.5 pad 0.25)
  Top 0.305: IC4.28 49.6,122.61 v49.6,122.11
  Bottom 0.305: v49.6,122.11 51.47,122.11 54.27,119.31 56.13,119.31 IC3.42
N$74  (via drill 0.6)
  Top 0.305: 53.51,122.38 53.51,122.25 | 53.51,122.25 IC4.6 | 53.51,122.25 53.51,120.69 55.82,118.38 55.82,117.29 56.29,116.82 v57.69,116.82
  Bottom 0.305: v57.69,116.82 58.78,116.82 59.38,117.43 | 59.4,117.29 59.4,117.45 59.38,117.43 | R55.1 59.38,117.43
N$75
  Top 0.305: 58.27,123.33 57.32,124.28 54.88,124.28 | 54.78,124.28 54.88,124.28 | 54.88,124.28 54.89,124.29 54.91,124.27 IC4.10
  Top 0.406: R56.2 58.27,123.33
N$76
  Top 0.305: LED5.C 43.83,122.53 43.67,122.7 R57.2
N$77
  Top 0.305: IC4.23 46.07,126.22 LED5.A
N$78
  Top 0.305: IC4.22 47.27,126.87 47.27,126.94 45.95,128.25 LED6.A
N$79
  Top 0.305: LED6.C 43.68,131.75 R58.2
N$80
  Top 0.305: R60.2 60.18,118.57 R59.2 C63.1
N$81
  Top 0.406: LED7.C R63.1
N$82
  Bottom 0.305: R64.1 56.13,128.18 55.67,127.71 54.42,127.71 54.27,127.56 | R65.1 45.27,134.07 48.51,130.83 53.96,130.83 54.27,130.51 54.27,127.56 | 54.27,127.56 IC3.33
PE
  Top 1.016: U$20.PE 48.9,60.96 45.4,57.47 45.4,40.96 41.27,36.83 41.27,4.13 39.37,2.22 28.57,2.22 X1.P$5
  Top 1.676: X1.P$5 19.05,7.3 16.19,4.45 7.62,4.45
  Bottom 1.676: X1.P$5 19.05,7.3 16.19,4.45 7.62,4.45
RESET  (via drill 0.5 pad 0.25)
  Top 0.305: SV5.1 26.2,106.19 25.25,107.14 19.85,107.14 18.27,108.73 v18.27,113.81
  Bottom 0.406: IC2.4 16.37,115.06 17.63,113.81 v18.27,113.81 21.76,113.81 22.08,114.12 R42.1 22.08,114.44
RESET1  (via drill 0.5 pad 0.25)
  Top 0.305: SV11.1 61.76,106.19 60.81,107.14 55.41,107.14 53.83,108.73 v53.83,113.81
  Bottom 0.406: IC3.4 51.93,115.06 53.19,113.81 v53.83,113.81 57.32,113.81 57.64,114.12 R54.1 57.64,114.44
RXD
  Bottom 0.305: SV8.3 5.4,132.54 6.35,131.59 6.35,117.62 7.62,116.35 9.53,116.35 10.48,117.3 12.23,117.3 12.37,117.16 IC2.9
RXD1
  Bottom 0.305: SV13.3 40.96,132.54 41.91,131.59 41.91,117.62 43.18,116.35 45.09,116.35 46.04,117.3 47.79,117.3 47.93,117.16 IC3.9
SCK  (via drill 0.5 pad 0.25)
  Top 0.305: SV10.1 8.5,112.22 13.58,117.3 v16.68,117.3 | IC1.4 16.68,121.03 16.84,120.87 16.84,117.46 v16.68,117.3 | v16.68,117.3
  Bottom 0.305: IC2.3 17.17,116.81 v16.68,117.3
SCK1  (via drill 0.5 pad 0.25)
  Top 0.305: SV15.1 44.06,112.22 49.14,117.3 v52.24,117.3 | IC4.4 52.24,121.03 52.4,120.87 52.4,117.46 v52.24,117.3 | v52.24,117.3
  Bottom 0.305: IC3.3 52.73,116.81 v52.24,117.3
SS  (via drill 0.6)
  Top 0.305: IC1.5 17.31,122.2 17.31,119.78 v19.02,118.07
  Bottom 0.406: IC2.44 19.34,117.75 v19.02,118.07
SS1  (via drill 0.6)
  Top 0.305: IC4.5 52.87,122.2 52.87,119.78 v54.58,118.07
  Bottom 0.406: IC3.44 54.9,117.75 v54.58,118.07
TXD
  Bottom 0.305: SV8.4 4.76,130 5.71,129.05 5.71,117.29 8.25,114.76 11.28,114.76 11.6,115.08 11.6,115.92 IC2.10
TXD1
  Bottom 0.305: SV13.4 40.32,130 41.27,129.05 41.27,117.29 43.81,114.76 46.84,114.76 47.16,115.08 47.16,115.92 IC3.10
U1  (via drill 0.6)
  Top 0.406: R25.1 91.44,54.61 86.36,49.53 77.15,49.53 73.03,45.4 v73.03,39.05
  Bottom 0.406: R1.1 70.06,38.42 | 70.06,38.42 R2.2 | v73.03,39.05 70.7,39.05 70.06,38.42
U2  (via drill 0.6)  (1 unrouted)
  Top 0.406: R26.1 94.61,54.29 89.85,49.53 89.85,22.54 v74.61,7.3
  Bottom 0.406: R11.1 70.7,7.2 70.8,7.3 | v74.61,7.3 R12.2
U3  (via drill 0.6)  (1 unrouted)
  Top 0.406: R27.1 97.79,56.2 90.81,49.21 90.81,20.64 v89.53,19.37
  Bottom 0.406: R5.1 70.7,15.66 70.48,15.88 69.22,15.88 68.9,16.19 68.9,17.46 | R13.2 69,18.52 69.53,19.05 78.42,19.05 78.74,19.37 v89.53,19.37
VCC_3V  (via drill 0.5, 0.5 pad 0.25)
  Top 0.305: IC1.11 22.39,124.92 | R49.1 22.39,124.92 | 22.39,124.92 24.93,124.92 R50.1 | IC1.15 18.63,127.82 | 20.81,114.44 C44.1 19.54,114.44 | IC1.16 17.98,130.13 v17.95,130.16 | v14.46,130.16 14.73,129.88 IC1.21 14.62,127.58 14.62,125.72 14.47,125.57 IC1.24
  Top 0.406: C47.2 28.74,130.32 | 28.74,130.32 29.38,129.68 29.38,125.56 28.74,124.92 | 28.74,124.92 24.93,124.92 | IC1.15 IC1.16 | 18.63,127.82 19.85,129.05 25.25,129.05 26.2,130 28.42,130 28.74,130.32 | IC3_3.3V-REGLER.3 28.11,114.44 29.38,115.71 29.38,124.28 28.74,124.92
  Top 0.61: IC3_3.3V-REGLER.3 20.81,114.44
  Bottom 0.305: v14.46,130.16 v17.95,130.16 | 26.8,114.49 26.8,114.48 IC3_3.3V-REGLER.3
  Bottom 0.406: R43.2 26.8,117.33 26.8,114.49
VCC_3V1  (via drill 0.5, 0.5 pad 0.25)
  Top 0.305: IC4.11 57.95,124.92 | R61.1 57.95,124.92 | 57.95,124.92 60.49,124.92 R62.1 | IC4.15 54.19,127.82 | 56.37,114.44 C61.1 55.1,114.44 | IC4.16 53.54,130.13 v53.51,130.16 | v50.02,130.16 50.29,129.88 IC4.21 50.18,127.58 50.18,125.72 50.03,125.57 IC4.24
  Top 0.406: C64.2 64.3,130.32 | 64.3,130.32 64.94,129.68 64.94,125.56 64.3,124.92 | 64.3,124.92 60.49,124.92 | IC4.15 IC4.16 | 54.19,127.82 55.41,129.05 60.81,129.05 61.76,130 63.98,130 64.3,130.32 | IC3_3.3V-REGLER1.3 63.67,114.44 64.94,115.71 64.94,124.28 64.3,124.92
  Top 0.61: IC3_3.3V-REGLER1.3 56.37,114.44
  Bottom 0.305: v50.02,130.16 v53.51,130.16 | 62.36,114.49 62.36,114.48 IC3_3.3V-REGLER1.3
  Bottom 0.406: R55.2 62.36,117.33 62.36,114.49
VCC_5V
  Top 0.406: LED4.A 16.88,105.35 16.06,104.53 16.06,104.58 SV5.5 | 20.43,109.36 19.95,108.89 C43.1
  Top 0.61: IC3_3.3V-REGLER.1 20.43,109.36
  Bottom 0.305: 10.01,130 C38.2 | C38.2 8.11,129.54 C37.2 7.93,133.64 R53.2 | IC2.27 13.97,128.25 13.26,128.96 11.71,128.96 10.62,130.05 9.99,130.05 10.01,130.03 C38.2 | C36.1 | 22.23,122.55 23.57,122.55 24,122.11 | 24,122.11 23.84,122.11 | 24,122.11 24,122.1 C48.1 | 10.46,121.8 10.56,121.8 10.62,121.75
  Bottom 0.406: 22.23,122.55 IC2.38 18.74,122.55 15.59,125.69 | C36.1 18.27,111.58 15.57,114.28 IC2.5 15.57,118.25 13.26,120.56 12.17,120.56 10.99,121.75 10.62,121.75 IC2.17 | C36.1 21.93,111.58 R42.2 | IC2.29 15.57,125.71 15.59,125.69 | 13.88,126 13.97,126.09 IC2.27 | 13.88,126 15.28,126 15.6,125.69 15.59,125.69 | 13.88,126 11.55,126 10.46,124.91 10.46,121.8
  Bottom 0.61: 22.08,107.78 20.49,107.78 18.58,105.87 SV5.4 SV5.5 | 22.08,107.78 25.23,107.78 IC3_3.3V-REGLER.1 | R42.2 22.08,107.78
VCC_5V1
  Top 0.406: LED7.A 52.44,105.35 51.62,104.53 51.62,104.58 SV11.5 | 55.98,109.36 55.51,108.89 C60.1
  Top 0.61: IC3_3.3V-REGLER1.1 55.98,109.36
  Bottom 0.305: 45.57,130 C55.2 | C55.2 43.67,129.54 C54.2 43.49,133.64 R65.2 | IC3.27 49.53,128.25 48.82,128.96 47.27,128.96 46.18,130.05 45.55,130.05 45.57,130.03 C55.2 | C53.1 | 57.79,122.55 59.12,122.55 59.56,122.11 | 59.56,122.11 59.4,122.11 | 59.56,122.11 59.56,122.1 C65.1 | 46.02,121.8 46.12,121.8 46.18,121.75
  Bottom 0.406: 57.79,122.55 IC3.38 54.3,122.55 51.15,125.69 | C53.1 53.83,111.58 51.13,114.28 IC3.5 51.13,118.25 48.82,120.56 47.73,120.56 46.55,121.75 46.18,121.75 IC3.17 | C53.1 57.49,111.58 R54.2 | IC3.29 51.13,125.71 51.15,125.69 | 49.44,126 49.53,126.09 IC3.27 | 49.44,126 50.84,126 51.16,125.69 51.15,125.69 | 49.44,126 47.11,126 46.02,124.91 46.02,121.8
  Bottom 0.61: 57.64,107.78 56.05,107.78 54.14,105.87 SV11.4 SV11.5 | 57.64,107.78 60.78,107.78 IC3_3.3V-REGLER1.1 | R54.2 57.64,107.78
(copper drawn outside any net)
  shapes: Bottom circle x2, Top circle x2

## Text on the board
Top: ADS ComSrv | ADS ComSrv | NTC | NTC | DAU Coupler 3~ 05/2012
Bottom: faschf | faschf